# EAGLE board emoteino (EAGLE 7.3.0)
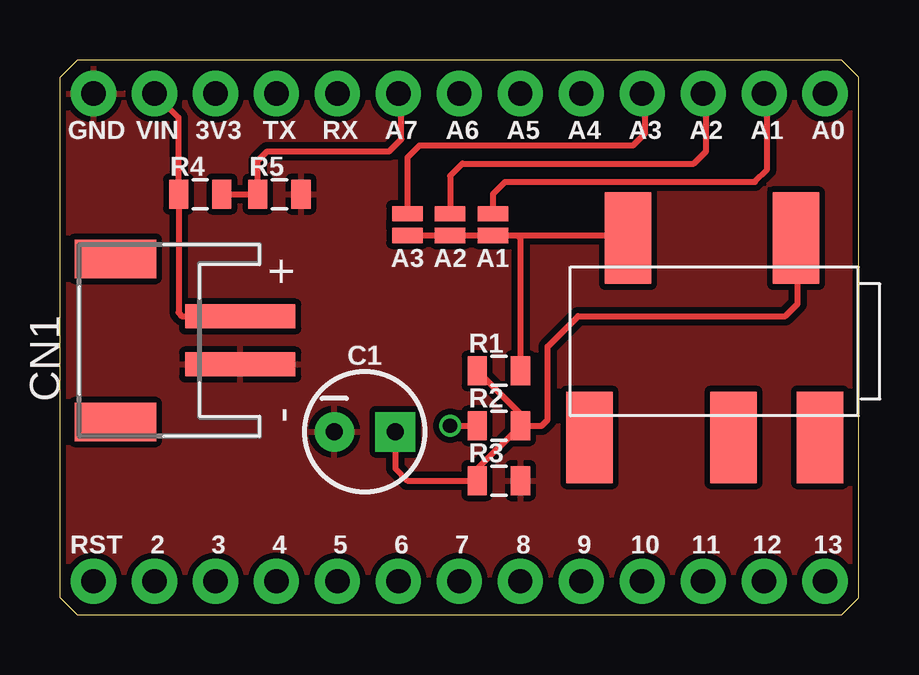
[diagram p0: board, top side]
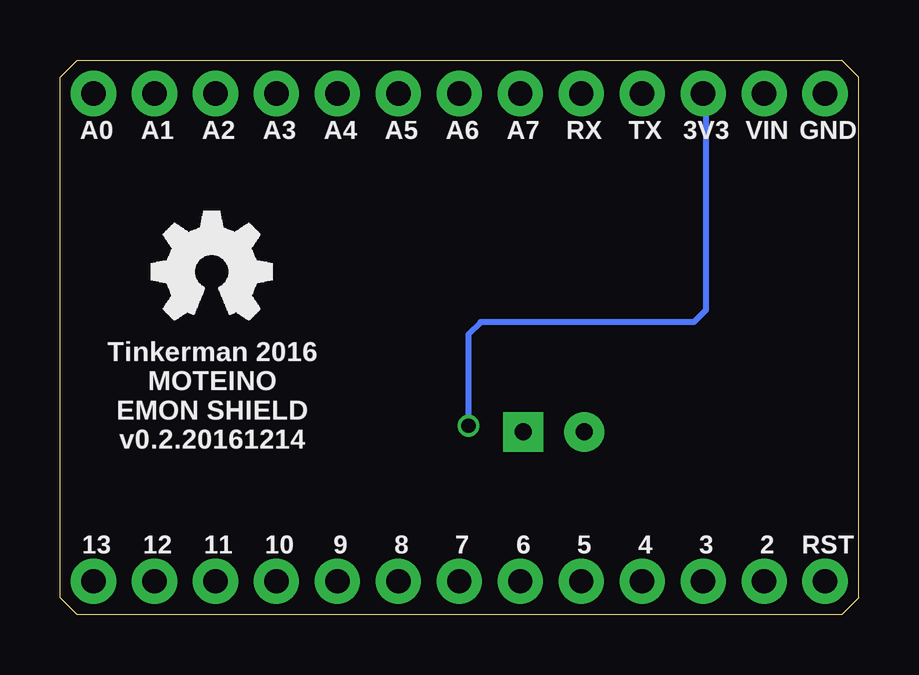
[diagram p1: board, bottom side, seen from below]

Size 33.27 x 23.11 mm. Coordinates in mm from the lower left corner, seen from the top.
Outline: 0.71,0 32.56,0 33.27,0.71 33.27,22.4 32.56,23.11 0.71,23.11 0,22.4 0,0.71 0.71,0
Copper layers (1*16): Top 0.035mm / dielectric 1.5mm / Bottom 0.035mm
Design rules "itead": minimum track width 6mil, minimum drill 12mil, track to track 6mil, track to pad 6mil, pad to pad 6mil, via to via 6mil, smd to smd 0mil, copper to edge 10mil, drill to drill 10mil, minimum pad ring 10mil, minimum via ring 6mil, stop-mask expansion 2mil, vias tented up to drill 100mil, thermal gap 10mil
Net classes: 1 power: width 0.381 mm, clearance 0.254 mm

## Footprints (pad centres in the part's own frame; a part is rotated, then mirrored left to right if it is on the bottom)
1X13_NO_SILK = drill 1.016 pad 1.88: 1 0,0; 2 2.54,0; 3 5.08,0; 4 7.62,0; 5 10.16,0; 6 12.7,0; 7 15.24,0; 8 17.78,0; 9 20.32,0; 10 22.86,0; 11 25.4,0; 12 27.94,0; 13 30.48,0
CPOL-RADIAL-10UF-25V = drill 0.7 pad 1.651 square: 1 1.27,0 | drill 0.7 pad 1.651: 2 -1.27,0
JST-PH-2-SMT-RA = smd 1 x 4.6: 1 1,-3.7; 2 -1,-3.7 | smd 1.6 x 3.4: NC1 -3.4,1.5; NC2 3.4,1.5
PJ-327A = smd 1.93 x 3.81: 2 9.1,-6.8; 3 2.1,-6.8; 4 1.1,1.5; 5 4.7,1.5; 6 10.7,1.5
0805 = smd 0.8 x 1.2: 1 -0.9,0; 2 0.9,0
SJ_2S-NO = smd 0.635 x 1.27: 1 -0.45,0; 2 0.45,0

## Placement (x,y rotation side)
ANALOGSIDE  M13  [1X13_NO_SILK]  31.88,21.72 180 top
C1  10uF  [CPOL-RADIAL-10UF-25V]  12.7,7.62 0 top
CN1  [JST-PH-2-SMT-RA]  3.81,11.43 90 top
CURR1  PJ-327A  [PJ-327A]  32.77,8.89 180 top
DIGITALSIDE  M13  [1X13_NO_SILK]  31.88,1.4 180 top
R1  ~  [0805]  18.29,10.16 0 top
R2  470K  [0805]  18.29,7.87 0 top
R3  470K  [0805]  18.29,5.59 0 top
R4  470K  [0805]  5.84,17.53 0 top
R5  470K  [0805]  9.14,17.53 0 top
SJ1  [SJ_2S-NO]  14.48,16.26 90 top
SJ2  [SJ_2S-NO]  16.26,16.26 90 top
SJ3  [SJ_2S-NO]  18.03,16.26 90 top

## Library data of the parts
ANALOGSIDE C1 DIGITALSIDE R1-R5 SJ1-SJ3 = xose
CN1 = adafruit
CURR1 = PJ-327A

## Nets
3V3: ANALOGSIDE.11 R2.1
A0: ANALOGSIDE.1
A1: ANALOGSIDE.2 SJ3.2
A2: ANALOGSIDE.3 SJ2.2
A3: ANALOGSIDE.4 SJ1.2
A4_SDA: ANALOGSIDE.5
A5_SCL: ANALOGSIDE.6
A6: ANALOGSIDE.7
A7: ANALOGSIDE.8 R4.2 R5.1
CIN: CURR1.2 R1.2 SJ1.1 SJ2.1 SJ3.1
D0_RX: ANALOGSIDE.9
D1_TX: ANALOGSIDE.10
D2: DIGITALSIDE.12
D3: DIGITALSIDE.11
D4: DIGITALSIDE.10
D5: DIGITALSIDE.9
D6: DIGITALSIDE.8
D7: DIGITALSIDE.7
D8: DIGITALSIDE.6
D9: DIGITALSIDE.5
D10_SS: DIGITALSIDE.4
D11_MOSI: DIGITALSIDE.3
D12_MISO: DIGITALSIDE.2
D13_SCK: DIGITALSIDE.1
GND [power]: ANALOGSIDE.13 C1.2 CN1.2 R3.2 R5.2
OFFSET: C1.1 CURR1.3 R1.1 R2.2 R3.1
RST: DIGITALSIDE.13
VIN: ANALOGSIDE.12 CN1.1 R4.1

## Tracks (layer width: path | path; a pad name or v marks a point on that pad's centre or on a via)
3V3  (via drill 0.6)
  Top 0.254: v16.26,7.87 R2.1
  Bottom 0.254: v16.26,7.87 16.26,11.68 15.75,12.19 6.86,12.19 6.35,12.7 6.35,21.59 ANALOGSIDE.11
A1
  Top 0.254: ANALOGSIDE.2 29.46,21.59 29.46,18.54 28.96,18.03 18.54,18.03 18.03,17.53 SJ3.2
A2
  Top 0.254: ANALOGSIDE.3 26.92,21.59 26.92,19.3 26.42,18.8 16.76,18.8 16.26,18.29 SJ2.2
A3
  Top 0.254: ANALOGSIDE.4 24.38,21.59 24.38,20.07 23.88,19.56 14.99,19.56 14.48,19.05 SJ1.2
A7
  Top 0.254: R4.2 R5.1 8.24,18.91 8.64,19.3 13.72,19.3 14.22,19.81 14.22,21.59 ANALOGSIDE.8
CIN
  Top 0.254: SJ1.1 SJ2.1 SJ3.1 19.05,15.81 | 19.05,15.81 23.55,15.81 CURR1.2 | R1.2 19.19,15.67 19.05,15.81
GND
  pour Top: -0.25,23.62 33.53,23.62 33.53,-0.25 -0.25,-0.25
OFFSET
  Top 0.254: 19.19,7.99 R2.2 17.39,6.07 R3.1 14.48,5.59 13.97,6.1 C1.1 | R1.1 19.19,8.36 19.19,7.99 | 19.19,7.99 19.3,7.87 20.07,7.87 20.32,8.13 20.32,11.18 21.59,12.45 30.23,12.45 30.73,12.95 30.73,15.62 CURR1.3
VIN
  Top 0.254: ANALOGSIDE.12 4.94,20.71 R4.1 4.94,12.58 5.08,12.45 6.99,12.45 CN1.1

## Text on the board
bPlace: Tinkerman 2016 / MOTEINO / EMON SHIELD / v0.2.20161214
tNames: GND | VIN | 3V3 | TX | RX | A7 | A6 | A5 | A4 | A3 | A2 | A1 | A0 | A3 | A2 | A1 | RST | 2 | 3 | 4 | 5 | 6 | 7 | 8 | 9 | 10 | 11 | 12 | 13
bNames: GND | VIN | 3V3 | TX | RX | A7 | A6 | A5 | A4 | A3 | A2 | A1 | A0 | RST | 2 | 3 | 4 | 5 | 6 | 7 | 8 | 9 | 10 | 11 | 12 | 13